# Altium PCB LKS_EVB_MCU081_V2.0.PcbDoc
Units mil, origin at the board's own origin, x right, y up, seen from the top; angles counter-clockwise.
Board outline 2625 x 1560 mil, 2 copper layers (Top Layer, Bottom Layer); 45 components, 64 nets, 192 pads, 63 vias.
Unrouted connection lines stored in the file: 4.
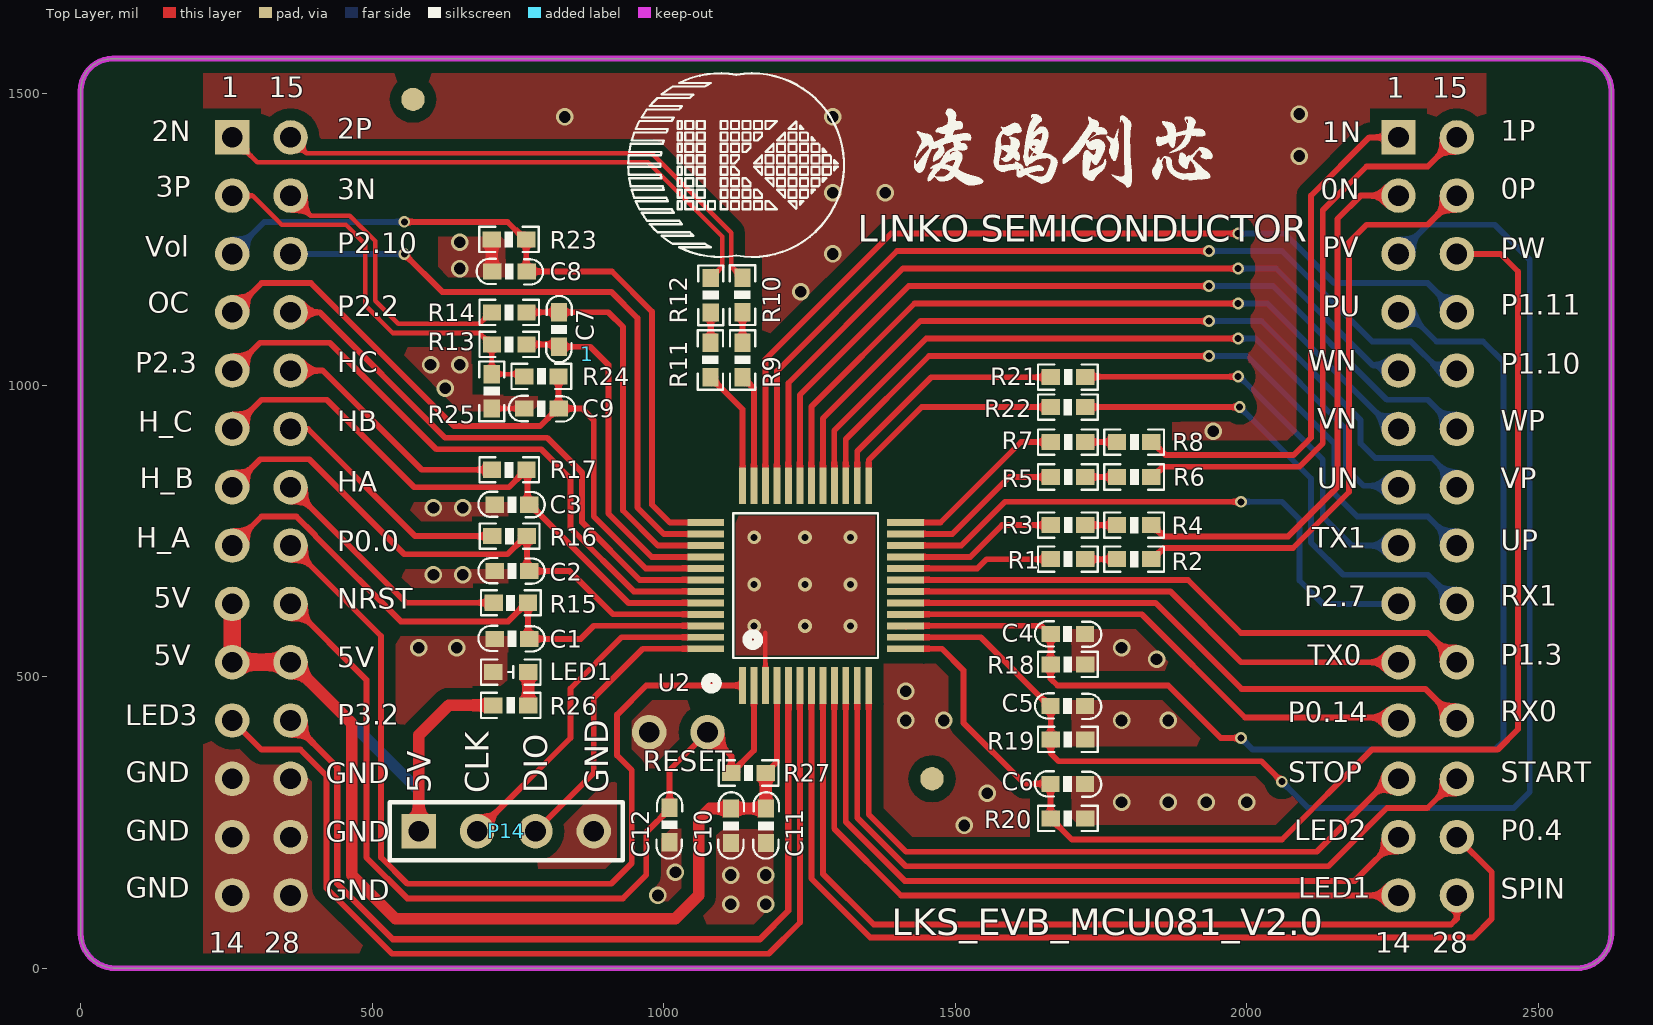
[diagram p0: Top Layer view]
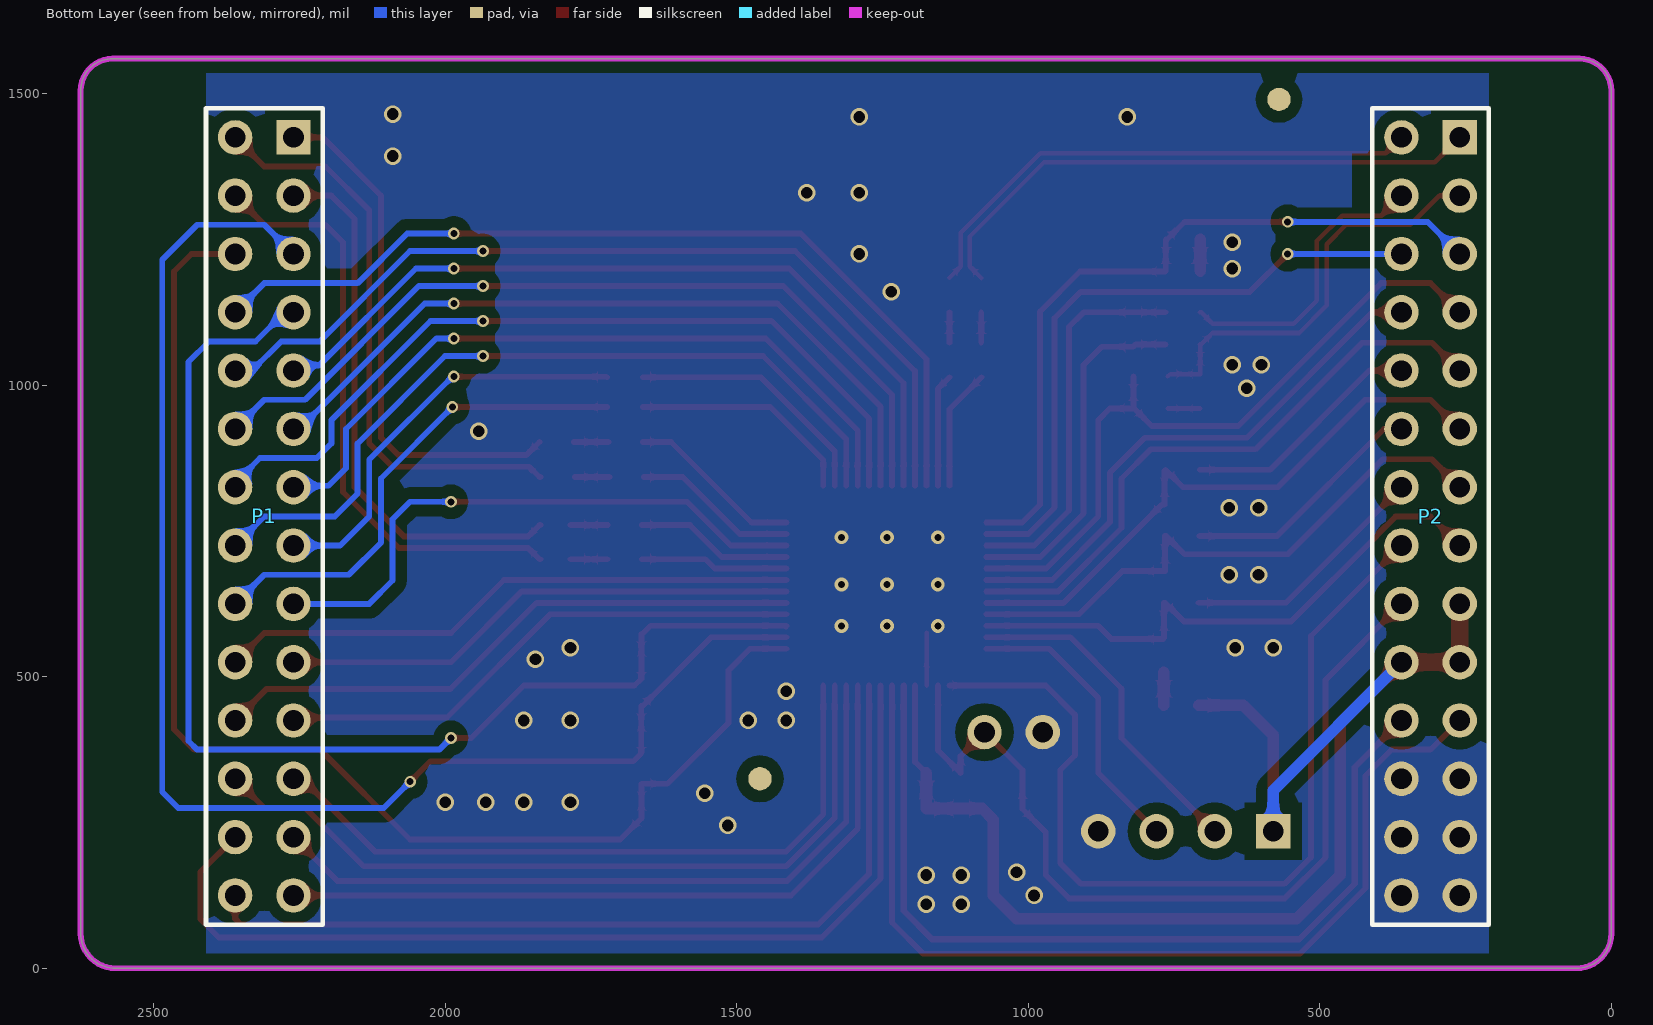
[diagram p1: Bottom Layer view, seen from below]

## Layer stack, top to bottom
Top Solder: solder mask 0.4, Solder Resist, Dk 3.5
Top Layer: signal copper 1.4
Dielectric1: dielectric 12.6, FR-4, Dk 4.8
Bottom Layer: signal copper 1.4
Bottom Solder: solder mask 0.4, Solder Resist, Dk 3.5

## Board outline
0,60 0,1505 cw(c55,1505) 55,1560 2570,1560 cw(c2570,1505) 2625,1505 2625,60 cw(c2565,60) 2565,0 60,0 cw(c60,60)

## Design rules (kind name [scope] priority, off if disabled: settings)
Clearance Clearance_2 [InPolygon] p1: gap=20 ignorepadtopadclearanceinfootprint=FALSE except(0: Arc-Hole Track-Hole SMDPad-Hole THPad-Hole Via-Hole Fill-Hole Poly-Hole Region-Hole Text-Hole)
Clearance Clearance_1 [All] p2: gap=7.87 ignorepadtopadclearanceinfootprint=FALSE except(0: Arc-Hole Track-Hole SMDPad-Hole THPad-Hole Via-Hole Fill-Hole Poly-Hole Region-Hole Text-Hole)
ComponentClearance [All] p1: gap=0 collisioncheckmode=3 verticalgap=0 showdistances=FALSE
DiffPairsRouting [All] p1: maxlimit=10 minlimit=10 mostfreqgap=10 toplayer_minwidth=8 toplayer_maxwidth=15 toplayer_prefwidth=10 bottomlayer_minwidth=8 bottomlayer_maxwidth=15 bottomlayer_prefwidth=10 maxuncoupledlength=500
FabricationTestpoint [(IsPad And (OnTopLayer Or OnBottomLayer))] p1: side=3 testpointundercomponent=TRUE minsize=40 maxsize=100 preferedsize=60 minholesize=0 maxholesize=40 preferedholesize=32 testpointgrid=1 allowsidetop=TRUE allowsidebottom=TRUE usegrid=TRUE gridtolerance=0.01
HoleSize [All] p1: absolutevalues=TRUE maxlimit=100 minlimit=0 maxpercent=80.000 minpercent=20.000
PolygonConnect [All] p1: connectstyle=Direct reliefconductorwidth=10 reliefentries=4 polygonreliefangle="90 Angle" airgapwidth=10
RoutingVias [All] p1: holewidth=28 width=50 viastyle="Through Hole" minholewidth=0 minwidth=10 maxholewidth=28 maxwidth=50
SilkToSolderMaskClearance SilkscreenOverComponentPads [IsPad] p1: minsilkscreentomaskgap=10 clearancetoexposedcopper=TRUE
SolderMaskExpansion [All] p1: expansion=4 istentingtop=FALSE
Width [All] p1: maxlimit=100 minlimit=1 preferedwidth=10
25 further rules are at their usual default settings.

## Components (designator, comment, footprint, x,y, rotation, side; value= is the part's Value field where it differs from the comment)
1 "LKS_sign" LKS_LOGO2 868.94,1052.83 r0 top
C1 "10nF/16V" 0603C 769.06,565 r180 top
C2 "10nF/16V" 0603C 769.06,681.13 r180 top
C3 "10nF/16V" 0603C 769.06,795 r180 top
C4 "1nF/16V" 0603C 1663.34,573.64 r0 top
C5 "1nF/16V" 0603C 1663.2,450 r0 top
C6 "1nF/16V" 0603C 1663.2,316.45 r0 top
C7 "1uF/50V" 0603C 820,1065.94 r90 top
C8 "100nF/50V" 0603C 705.94,1195 r0 top
C9 "1nF/50V" 0603C 760.94,960 r0 top
C10 "10uF/10V" 0603C 1115,215 r90 top
C11 "100nF/50V" 0603C 1175,215 r90 top
C12 "100nF/50V" 0603C 1010,275.24 r270 top
LED1 "LED" "LED 0603R" 737.57,508 r180 top
P1 "Header 14X2A" HDR2X14_CEN 2260,1425 r270 bottom locked
P2 "Header 14X2A" HDR2X14_CEN 260,1425 r270 bottom locked
P14 "Header 4" HDR1X4 580,235 r0 top
R1 "20K1%" 0603R#1 1722.56,701.59 r180 top value=K
R2 "20K1%" 0603R#1 1836.22,701.59 r180 top value=K
R3 "20K1%" 0603R#1 1722.56,760 r180 top value=K
R4 "20K1%" 0603R#1 1836.22,760 r180 top value=K
R5 "20K1%" 0603R#1 1722.56,842.52 r180 top value=K
R6 "20K1%" 0603R#1 1836.22,842.52 r180 top value=K
R7 "20K1%" 0603R#1 1722.56,902.52 r180 top value=K
R8 "20K1%" 0603R#1 1836.22,902.52 r180 top value=K
R9 "20K1%" 0603R#1 1135.08,1072.79 r270 top value=K
R10 "20K1%" 0603R#1 1135,1184.06 r270 top value=K
R11 "20K1%" 0603R#1 1080.05,1072.79 r270 top value=K
R12 "20K1%" 0603R#1 1080.6,1183.74 r270 top value=K
R13 "1K1%" 0603R#1 705.5,1070 r0 top value=K
R14 "1K1%" 0603R#1 705.5,1125 r0 top value=K
R15 "2K" 0603R#1 708.22,626.9 r0 top value=K
R16 "2K" 0603R#1 706.13,741.13 r0 top value=K
R17 "2K" 0603R#1 705.5,855 r0 top value=K
R18 "1K" 0603R#1 1663.5,521.25 r0 top value=K
R19 "1K" 0603R#1 1663.5,392.6 r0 top value=K
R20 "1K" 0603R#1 1663.5,257.18 r0 top value=K
R21 "10R" 0603R#1 1722.56,1013.7 r180 top value=K
R22 "10R" 0603R#1 1663.5,962.52 r0 top value=K
R23 "1K1%" 0603R#1 705,1250 r0 top value=K
R24 "1K1%" 0603R#1 819.56,1015 r180 top value=K
R25 "10R" 0603R#1 705,1019.06 r270 top value=K
R26 "330R" 0603R#2 737.57,451 r0 top value=330
R27 "20K" 0603R#1 1115.94,335 r0 top value=K
U2 "LKS081/088/083" LINKO-081 1135,485 r0 top

## Footprints (in the part's own frame and the unit in brackets; to place one, negate y for a bottom-side part, rotate by r counter-clockwise, add the part's x,y. Pads: shape width x height; smd on the part's side, far side on the other; paste and mask are expansions set on the pad)
0603C [mm]
  rect 0.8x0.7 smd: 1(0,0) 2(1.5,0)
  silkscreen extent -0.68,-0.57 2.21,0.55
0603R#1 [mm]
  rect 0.8x0.7 smd: 1(0,0) 2(1.5,0)
  silkscreen extent -0.55,-0.55 2.05,0.55
0603R#2 [mm] "电阻"
  rect 0.8x0.7 smd: 1(-0.762,0) 2(0.762,0)
  silkscreen extent -1.3,-0.55 1.3,0.55, body extent -0.8,-0.4 0.8,0.4, height 0.45
HDR1X4 [mm] "Connector; Header; 4 Position"
  rect 1.5x1.5 hole 0.9: 1(0,0)
  round 1.5 hole 0.9: 2(2.54,0) 3(5.08,0) 4(7.62,0)
  silkscreen extent -1.27,-1.27 8.89,1.27
HDR2X14_CEN [mm] "Connector; Header; 14x2 Position"
  rect 1.5x1.5 hole 0.9: 1(0,0)
  round 1.5 hole 0.9: 2(2.54,0) 3(5.08,0) 4(7.62,0) 5(10.16,0) 6(12.7,0) 7(15.24,0) 8(17.78,0) 9(20.32,0) 10(22.86,0) 11(25.4,0) 12(27.94,0) 13(30.48,0) 14(33.02,0) 15(0,-2.54) 16(2.54,-2.54) 17(5.08,-2.54) 18(7.62,-2.54) 19(10.16,-2.54) 20(12.7,-2.54) 21(15.24,-2.54) 22(17.78,-2.54) 23(20.32,-2.54) 24(22.86,-2.54) 25(25.4,-2.54) 26(27.94,-2.54) 27(30.48,-2.54) 28(33.02,-2.54)
  silkscreen extent -1.27,-3.81 34.29,1.27
"LED 0603R" [mm] "LED"
  rect 0.8x0.7 smd: 1(-0.762,0) 2(0.762,0)
  silkscreen extent -1.3,-0.55 1.3,0.55, body extent -0.8,-0.4 0.8,0.4, height 0.47
LINKO-081 [mm]
  rect 0.3x1.6 smd: 1(0,0) 2(0.5,0) 3(1,0) 4(1.5,0) 5(2,0) 6(2.5,0) 7(3,0) 8(3.5,0) 9(4,0) 10(4.5,0) 11(5,0) 12(5.5,0) 25(5.5,8.7) 26(5,8.7) 27(4.5,8.7) 28(4,8.7) 29(3.5,8.7) 30(3,8.7) 31(2.5,8.7) 32(2,8.7) 33(1.5,8.7) 34(1,8.7) 35(0.5,8.7) 36(0,8.7)
  rect 1.6x0.3 smd: 13(7.1,1.6) 14(7.1,2.1) 15(7.1,2.6) 16(7.1,3.1) 17(7.1,3.6) 18(7.1,4.1) 19(7.1,4.6) 20(7.1,5.1) 21(7.1,5.6) 22(7.1,6.1) 23(7.1,6.6) 24(7.1,7.1) 37(-1.6,7.1) 38(-1.6,6.6) 39(-1.6,6.1) 40(-1.6,5.6) 41(-1.6,5.1) 42(-1.6,4.6) 43(-1.6,4.1) 44(-1.6,3.6) 45(-1.6,3.1) 46(-1.6,2.6) 47(-1.6,2.1) 48(-1.6,1.6)
  silkscreen extent -1.6,-0.15 5.9,7.5
LKS_LOGO2 [mil] "标?"
  silkscreen extent 70,167 440,482

## Part data
C1 C2 C3 C4 C5 C6: library part CAP, "Capacitor"
C7 C8 C9 C10 C11 C12: library part C, "Capacitor"
LED1: "LED_Light"
P1 P2: "Header, 14-Pin, Dual row", LatestRevisionDate=17-Jul-2002, LatestRevisionNote="Re-released for DXP Platform.", Publisher="Altium Limited"
P14: "Header, 4-Pin", LatestRevisionDate=17-Jul-2002, LatestRevisionNote="Re-released for DXP Platform.", Publisher="Altium Limited"
R1 R2 R3 R4 R5 R6 R7 R8 R9 R10 R11 R12 R13 R14 R15 R16 R17 R18 R19 R20 R21 R22 R23 R24 R25 R26 R27: library part Res, "Resistor", LatestRevisionDate=17-Jul-2002, LatestRevisionNote="Re-released for DXP Platform.", PackageDescription="Axial Device, Thru-Hole; 2 Leads; 0.4 in Pin Spacing", PackageReference=AXIAL-0.4, Published=8-Jun-2000, Publisher="Altium Limited"
U2: library part LKS081C8T8, "芯片"

## Free pads (board coordinates)
  round 59.06 hole 35.43: 0(1075,405) 1(975,405)
  round 40 all layers, no hole: 2(1460,325) 3(570,1490)

## Via types
v1: diameter 30, hole 20, Top Layer to Bottom Layer, 39 vias
v2: diameter 20, hole 12, Top Layer to Bottom Layer, 15 vias
v3: diameter 23.62, hole 11.81, Top Layer to Bottom Layer, 9 vias

## Nets (pads, with @x,y where several pads share a name; then routed paths per layer and width w, separated by ;. In a path a pad name is that pad's centre, name@x,y a point inside that pad or via, vN(x,y) a via of type N, cw(c..) or ccw(c..) an arc to the next point about the centre after c; other vN are vias at no path point)
+5V: C10.2 C11.2 P2.9 P2.10 P2.24 P14.1 R26.1 R27.2 U2.4 | length 2417.7
  Top Layer w10: R27.2 1194.06,354.06 U2.4
  Top Layer w20: P2.24 465,420 465,160 540,85 1020,85 1060,125 1060,255 1079.06,274.06 C10.2 C11.2 R27.2 ; P14.1 580,400 631,451 R26.1
  Top Layer w30: P2.9 P2.10 P2.24
  Bottom Layer w20: P2.24 580,305 P14.1
GND: C1.2 C2.2 C3.2 C4.2 C5.2 C6.2 C8.1 C9.1 C10.1 C11.1 C12.2 LED1.2 P2.12 P2.13 P2.14 P2.16 P2.26 P2.27 P2.28 P14.4 pad.1 R14.1 R18.2 R19.2 R20.2 R23.1 R25.2 U2.3 | length 706.5
  Top Layer w7.87: P2.16 394.25,1290.75 461.52,1290.75 505,1247.27 505,1145 544.81,1105.19 683.72,1105.19 703.53,1125 R14.1 ; R25.2 C9.1 ; C8.1@705,1195.94 C8.1 ; U2.3 1174.37,575.51
  Top Layer w20: C8.1@705,1195.94 R23.1
  other v1: 1115,110 1175,110 990,125 1115,160 1175,160 1020,165 1515,245 1785,285 1865,285 1930,285 2000,285 1555,300 1415,425 1480,425 1785,425 1865,425 1415,475 1845,530 580,550 645,550 1785,550 605,675 655,675 605,790 655,790 1942,921 625,995 600,1035 650,1035 1235,1160 650,1200 1290,1225 650,1245 1290,1330 1380,1330 2090,1393 830,1460 1290,1460 2090,1465
  other v3: 1155,587.04 1242,587.04 1320,587.04 1155,658 1242,658 1320,658 1155,739.07 1242,739.07 1320,739.07
HALL_U: C1.1 P2.8 R15.2 U2.46 | length 991.2
  Top Layer w10: P2.8 310,775 369.96,775 402.4,742.56 402.4,741.55 548.95,595 733.41,595 765.31,626.9 R15.2 767.28,566.78 C1.1 857.64,565 880,587.36 U2.46
HALL_V: C2.1 P2.7 R16.2 U2.45 | length 1002.7
  Top Layer w10: P2.7 307.99,872.99 392.01,872.99 555,710 732.08,710 763.21,741.13 R16.2 765.65,740.66 765.65,681.13 838.87,681.13 912.95,607.05 U2.45
HALL_W: C3.1 P2.6 R17.2 U2.44 | length 1035.9
  Top Layer w10: P2.6 310,975 421.96,975 571.96,825 734.56,825 R17.2 766.33,853.23 766.33,795 C3.1 771.02,795 939.29,626.73 U2.44
HU: P2.21 R15.1 | length 430.3
  Top Layer w10: P2.21 558.1,626.9 R15.1
HV: P2.20 R16.1 | length 422.3
  Top Layer w10: P2.20 389.75,925 573.62,741.13 R16.1
HW: P2.19 R17.1 | length 415.9
  Top Layer w10: P2.19 415,1025 585,855 R17.1
LED1: P1.14 U2.9 | length 1260.4
  Top Layer w10: U2.9 1292.48,239.52 1407,125 P1.14
LED2: P1.13 U2.10 | length 1254.6
  Top Layer w10: U2.10 1312.17,251.15 1413.32,150 2185,150 P1.13
LED3: P2.11 U2.6 | length 1680.9
  Top Layer w10: P2.11 310,375 377.01,375 421.63,330.38 421.63,137.39 534.02,25 1180,25 1233.43,78.43 U2.6
NetLED1_1: LED1.1 R26.2 | length 57
  Top Layer w20: R26.2 LED1.1
NetR1_1: R1.1 R2.2 | length 63.6
  Top Layer w10: R1.1@1721.39,701.59 R2.2@1785,701.59
NetR3_1: R3.1 R4.2 | length 63.9
  Top Layer w10: R3.1@1721.1,760 R4.2@1785,760
NetR5_1: R5.1 R6.2 | length 59.1
  Top Layer w10: R5.1@1718.11,842.52 R6.2
NetR7_1: R7.1 R8.2 | length 59.1
  Top Layer w10: R7.1@1720.04,902.52 R8.2@1779.09,902.52
NetR9_1: R9.1 R10.2 | length 52.1
  Top Layer w10: R9.1@1135,1072.88 R10.2
NetR11_1: R11.1 R12.2 | length 51.3
  Top Layer w10: R11.1@1080.6,1073.34 R12.2
NetR21_2: R21.2 U2.26 | length 441
  Top Layer w10: U2.26 1331.85,886.85 1458.7,1013.7 R21.2@1660.98,1013.7
NetR22_1: R22.1 U2.25 | length 391.1
  Top Layer w10: U2.25 1351.54,871.54 1442.52,962.52 R22.1@1660.98,962.52
NRST: C12.1 P2.23 pad.0 R27.1 U2.2 | length 1555.9
  Top Layer w10: P2.23 490,495 490,190 560,120 930,120 970,160 970,233.27 1010,273.27 C12.1 1010,340 pad.0 1115.94,364.06 R27.1 1154.69,373.74 U2.2
OC: C9.2 P2.4 R24.1 U2.41 | length 1212
  Top Layer w10: P2.4 310,1175 395,1175 640,930 788.03,930 818.03,960 C9.2 ; R24.1 819.56,960.44 C9.2 ; U2.41 969.21,685.79 880,775 880,940 860,960 C9.2
OPA0_IN: R3.2 U2.21 | length 270.1
  Top Layer w10: U2.21 1525.47,705.47 1580,760 R3.2@1662.04,760
OPA0_IP: R1.2 U2.20 | length 254.4
  Top Layer w10: U2.20 1537.59,685.79 1553.39,701.59 R1.2@1662.34,701.59
OPA1_IN: R7.2 U2.24 | length 303.6
  Top Layer w10: U2.24 1474.53,764.53 1612.52,902.52 R7.2@1660.98,902.52
OPA1_IP: R5.2 U2.23 | length 285
  Top Layer w10: U2.23 1494.84,744.84 1592.52,842.52 R5.2@1659.06,842.52
OPA2_IN: R11.2 U2.36 | length 209
  Top Layer w10: R11.2 1135,958.79 U2.36
OPA2_IP: R9.2 U2.35 | length 194.3
  Top Layer w10: R9.2 1154.68,994.14 U2.35
OPA3_IN: C7.2 R14.2 U2.39 | length 657.6
  Top Layer w10: R14.2 C7.2 905,1125 930,1100 930,785 989.84,725.16 U2.39
OPA3_IP: C7.1 R13.2 U2.40 | length 607.8
  Top Layer w10: R13.2 815.94,1070 C7.1 874.06,1065.94 905,1035 905,780 979.53,705.47 U2.40
P0.0: P2.22 U2.1 | length 1563.2
  Top Layer w10: P2.22 515,570 515,190.28 560.28,145 910,145 945,180 945,340 920,365 920,435 970,485 U2.1
P0.4: P1.27 U2.7 | length 1717.8
  Top Layer w10: U2.7 1253.11,154.05 1354.16,53 2388,53 2420,85 2420,165 P1.27
P0.14: P1.11 U2.16 | length 920.9
  Top Layer w10: U2.16 1819.69,607.05 1996.73,430 2255,430 P1.11
P1.3: P1.24 U2.19 | length 1003.9
  Top Layer w10: U2.19 1898.9,666.1 1990,575 2310,575 P1.24
P1.10: P1.19 U2.33 | length 1532.7
  Top Layer w10: U2.33 1194.06,1024.06 1400,1230 v2(1935,1230)
  Bottom Layer w10: v2(1935,1230) 2060,1230 2215,1075 2280.99,1075 2330.99,1025 P1.19
P1.11: P1.18 U2.34 | length 1547.7
  Top Layer w10: U2.34 1174.37,1044.37 1390,1260 v2(1985,1260)
  Bottom Layer w10: v2(1985,1260) 2065,1260 2150,1175 2310,1175 P1.18
P2.2: P2.18 U2.42 | length 951.9
  Top Layer w10: P2.18 410,1125 625,910 800,910 860,850 860,765 958.9,666.1 U2.42
P2.3: P2.5 U2.43 | length 1058.2
  Top Layer w10: P2.5 307.79,1072.79 427.21,1072.79 610,890 790,890 840,840 840,755 948.58,646.42 U2.43
P2.7: P1.9 U2.22 | length 1010.5
  Top Layer w10: U2.22 1510.16,725.16 1585,800 v2(1990,800)
  Bottom Layer w10: v2(1990,800) 2060,800 2090,770 2090,665 2130,625 P1.9
P2.10: P2.17 U2.38 | length 1101.3
  Top Layer w10: v2(555,1225) 620,1160 910,1160 955,1115 955,790 1000.16,744.84 U2.38
  Bottom Layer w10: P2.17 v2(555,1225)
P3.2: P2.25 U2.5 | length 1532.7
  Top Layer w11: P2.25 440,345 440,145 535,50 1165,50 1213.74,98.74 U2.5
PGND: P1.1 P1.2 P2.1 P2.2 R4.1 R8.1 R12.1 R13.1 R24.2 R25.1 | length 3566.5
  Top Layer w7.87: P2.2 295,1325 345,1275 455,1275 488.19,1241.81 488.19,1136.81 535.56,1089.44 684.09,1089.44 703.53,1070 R13.1 705,1069.5 R25.1 756.45,1019.06 R24.2 ; P2.1 302.91,1382.09 972.91,1382.09 1100,1255 1100,1203.14 R12.1 ; P1.1@2260,1412.38 P1.1
  Top Layer w10: R4.1 1838.19,760 1857.4,740.79 2070.79,740.79 2155.1,825.1 2155.1,1285.1 2195,1325 P1.2 ; R8.1@1838.19,902.52 1860.71,880 2080,880 2110,910 2110,1325 2210,1425 P1.1
PU: C4.1 P1.4 R18.1 U2.15 | length 2031.2
  Top Layer w10: U2.15@1415.43,586.46 U2.15 1647.65,587.36 1661.37,573.64 C4.1 1663.34,496.66 1675,485 1865,485 1955,395 v2(1990,395)
  Bottom Layer w10: v2(1990,395) 2010,375 2425,375 2440,390 2440,1040 2405,1075 2325,1075 2275,1125 P1.4
PV: C5.1 P1.3 R19.1 U2.14 | length 2434
  Top Layer w10: U2.14 1543.55,567.68 1661.23,450 C5.1 1663.5,449.7 R19.1 1663.5,368.43 1676.93,355 2025,355 v2(2060,320)
  Bottom Layer w10: v2(2060,320) 2105.15,274.85 2457.48,274.85 2485,302.37 2485,1215 2424.98,1275.02 2310.02,1275.02 P1.3
PW: C6.1 P1.17 R20.1 U2.13 | length 2254
  Top Layer w10: U2.13 1477.01,547.99 1513.76,511.24 1513.76,421.24 1618.55,316.45 C6.1 R20.1@1663.2,257.34 ; R20.1@1663.35,257.18 1699.79,220.75 2060,220.75 2214.25,375 2430,375 2465,410 2465,1195 2435,1225 P1.17
RXD0: P1.25 U2.17 | length 1029
  Top Layer w10: U2.17 1843.27,626.73 1990.74,479.26 2305.74,479.26 P1.25
RXD1: P1.23 R22.2 | length 841.7
  Top Layer w10: R22.2 v2(1987.52,962.52)
  Bottom Layer w10: v2(1987.52,962.52) 2110,840.03 2110,730 2165,675 2310,675 P1.23
SPIN: P1.28 U2.8 | length 1490.3
  Top Layer w10: U2.8 1272.8,162.2 1360,75 2350,75 2360,85 P1.28
START1: P1.26 U2.11 | length 1351.6
  Top Layer w10: U2.11 1331.85,258.15 1415,175 2140,175 2239.85,274.85 2309.85,274.85 P1.26
STOP1: P1.12 U2.12 | length 1207.9
  Top Layer w10: U2.12 1351.54,263.74 1415.28,200 2119.72,200 2244.72,325 P1.12
SWCLK: P14.2 U2.47 | length 579.6
  Top Layer w10: P14.2 840,395 840,480 927.68,567.68 U2.47
SWDIO: P14.3 U2.48 | length 497.1
  Top Layer w10: P14.3 880,335 880,463.82 964.17,547.99 U2.48
TXD0: P1.10 U2.18 | length 895.8
  Top Layer w10: U2.18 1868.58,646.42 1990,525 P1.10
TXD1: P1.8 R21.1 | length 715.2
  Top Layer w10: R21.1 1723.21,1014.35 1984.35,1014.35 v2(1985,1015)
  Bottom Layer w10: v2(1985,1015) 1987.4,1015 2130,872.4 2130,775 2180,725 P1.8
UN: P1.7 U2.28 | length 1272.9
  Top Layer w10: U2.28 1292.48,922.48 1450,1080 v2(1985,1080)
  Bottom Layer w10: v2(1985,1080) 2015,1080 2170,925 2170,857.52 2200,827.52 2257.48,827.52 P1.7
UP: P1.22 U2.27 | length 1371.5
  Top Layer w10: U2.27 1312.17,907.17 1455,1050 v2(1935,1050)
  Bottom Layer w10: v2(1935,1050) 2000,1050 2150,900 2150,814.23 2189.22,775 2310,775 P1.22
UP-: P2.15 R10.1 | length 908.9
  Top Layer w7.87: P2.15 387.17,1397.83 979.44,1397.83 1115.75,1261.52 1115.75,1203.31 R10.1
VN: P1.6 U2.30 | length 1306.5
  Top Layer w10: U2.30 1253.11,963.11 1430,1140 v2(1985,1140)
  Bottom Layer w10: v2(1985,1140) 2035,1140 2250,925 P1.6 P1.6@2260,926.73
VOL_ADC: C8.2 P2.3 R23.2 U2.37 | length 1273.9
  Top Layer w10: v2(555,1280) 732.09,1280 762.09,1250 R23.2 764.06,1195.94 C8.2 911.13,1195 980,1126.13 980,795 1010.47,764.53 U2.37
  Bottom Layer w10: P2.3 315,1280 v2(555,1280)
VP: P1.21 U2.29 | length 1417.5
  Top Layer w10: U2.29 1272.8,942.8 1440,1110 v2(1935,1110)
  Bottom Layer w10: v2(1935,1110) 2025,1110 2195,940 2195,900 2220,875 2317.25,875 2360,832.25 P1.21
VP-: P1.15 R6.1 | length 999.4
  Top Layer w10: R6.1 1838.19,842.52 1855.67,860 2090,860 2130,900 2130,1300 2205,1375 2310,1375 P1.15
WN: P1.5 U2.32 | length 1376.3
  Top Layer w10: U2.32 1213.74,1003.74 1410,1200 v2(1985,1200)
  Bottom Layer w10: v2(1985,1200) 2050,1200 2215.61,1034.39 2250.61,1034.39 P1.5
WP: P1.20 U2.31 | length 1461.2
  Top Layer w10: U2.31 1233.43,983.43 1420,1170 v2(1935,1170)
  Bottom Layer w10: v2(1935,1170) 2045,1170 2240,975 2310,975 P1.20
WP-: P1.16 R2.1 | length 1032.9
  Top Layer w10: R2.1 1838.19,701.59 1857.4,720.79 2079.08,720.79 2175.1,816.82 2175.1,1245.1 2205,1275 2310,1275 P1.16

## Polygon pours and split planes (outlines as drawn)
GND on Top Layer "Top Layer-No Net 1" (solid, remove dead copper, pour order 4): 210,1560 210,0 2410,0 2410,1560
GND on Bottom Layer "Top Layer-No Net 1" (solid, remove dead copper, pour order 6): 210,1560 210,0 2410,0 2410,1560

## Keep-outs
Keep-Out Layer:
  the board outline again, w10

## Other copper
Top Layer:
  pour cut-out: 472.58,1385 508.1,1385 613.34,1279.76 613.34,1185 614.08,1185 652.43,1146.65 723.31,1146.65 723.31,1083.78 714.53,1075 565.02,1075 365.02,1275 210,1275 210,1385
Bottom Layer:
  pour cut-out: 300,1395 302.83,1397.83 445,1397.83 445,1280 300,1280

## Silkscreen, mask and mechanical layers (free items; w line width, h text height)
Top Overlay:
  drawing of 7 lines, arcs and shapes, not listed
  text "2P" at 440,1411 h60
  text "1P" at 2435,1407 h60
  text "2N" at 121.7,1406 h60
  text "1N" at 2129,1405 h60
  text "3P" at 128.81,1311 h60
  text "0P" at 2434.94,1308 h60
  text "3N" at 439.94,1307 h60
  text "0N" at 2126.28,1307 h60
  text "P2.10" at 440,1214 h60
  text "Vol" at 110.82,1208 h60
  text "PV" at 2129.78,1207 h60
  text "PW" at 2435,1206 h60
  text "OC" at 115.43,1112 h60
  text "P1.11" at 2435,1109 h60
  text "P2.2" at 440,1106 h60
  text "PU" at 2130.22,1106 h60
  text "WN" at 2105.36,1013 h60
  text "HC" at 440,1010 h60
  text "P2.3" at 94.06,1009 h60
  text "P1.10" at 2435,1008 h60
  text "VN" at 2120.62,913 h60
  text "WP" at 2435,910 h60
  text "HB" at 440,909 h60
  text "H_C" at 99.17,908 h60
  text "H_B" at 101,811 h60
  text "UN" at 2121.01,811 h60
  text "VP" at 2434.94,811 h60
  text "HA" at 440,805 h60
  text "H_A" at 95.73,709 h60
  text "TX1" at 2112.07,709 h60
  text "UP" at 2434.94,705 h60
  text "P0.0" at 440,703 h60
  text "RX1" at 2435,610 h60
  text "P2.7" at 2098.25,609 h60
  text "5V" at 125.03,606 h60
  text "NRST" at 440,605 h60
  text "P1.3" at 2435,509 h60
  text "5V" at 125.03,508 h60
  text "TX0" at 2104.36,508 h60
  text "5V" at 439.94,504 h60
  text "RX0" at 2435,412 h60
  text "P0.14" at 2070.11,410 h60
  text "P3.2" at 440,406 h60
  text "LED3" at 76.52,405 h60
  text "RESET" at 964,326 h60
  text "GND" at 77.36,307 h60
  text "STOP" at 2071.11,307 h60
  text "START" at 2434.94,307 h60
  text "GND" at 420,305 h60
  text "5V" at 600,300 h40 r90
  text "CLK" at 700,300 h40 r90
  text "DIO" at 800,300 h40 r90
  text "GND" at 905,300 h40 r90
  text "LED2" at 2080.77,208 h60
  text "P0.4" at 2435,208 h60
  text "GND" at 77.36,207 h60
  text "GND" at 420,205 h60
  text "GND" at 77.36,109 h60
  text "LED1" at 2088.04,109 h60
  text "SPIN" at 2434.94,107 h60
  text "GND" at 420,105 h60
  text "LKS_EVB_MCU081_V2.0" at 1391,41 h78.74
Top Solder:
  circle w77.95: c1460,325 r17.01
  circle w77.99: c570,1490 r17.01
Mechanical 1:
  the board outline again, w10

## Text inside footprints (layer, text, board x,y; h text height)
1: Top Overlay "LINKO SEMICONDUCTOR" at 1332.94,1230.83 h78.74
P1: Top Overlay "1" at 2240,1481 h60; Top Overlay "28" at 2318,15 h60; Top Overlay "15" at 2318,1481 h60; Top Overlay "14" at 2220,15 h60
P2: Top Overlay "28" at 315,15 h60; Top Overlay "1" at 241,1482 h60; Top Overlay "15" at 322.76,1481.6 h60; Top Overlay "14" at 220,15 h60